# Altium PCB PAM_Interface.PcbDoc
Units mm, origin at the board's own origin, x right, y up, seen from the top; angles counter-clockwise.
Board outline 52 x 25 mm, 2 copper layers (Top Layer, Bottom Layer); 27 components, 21 nets, 111 pads, 26 vias.
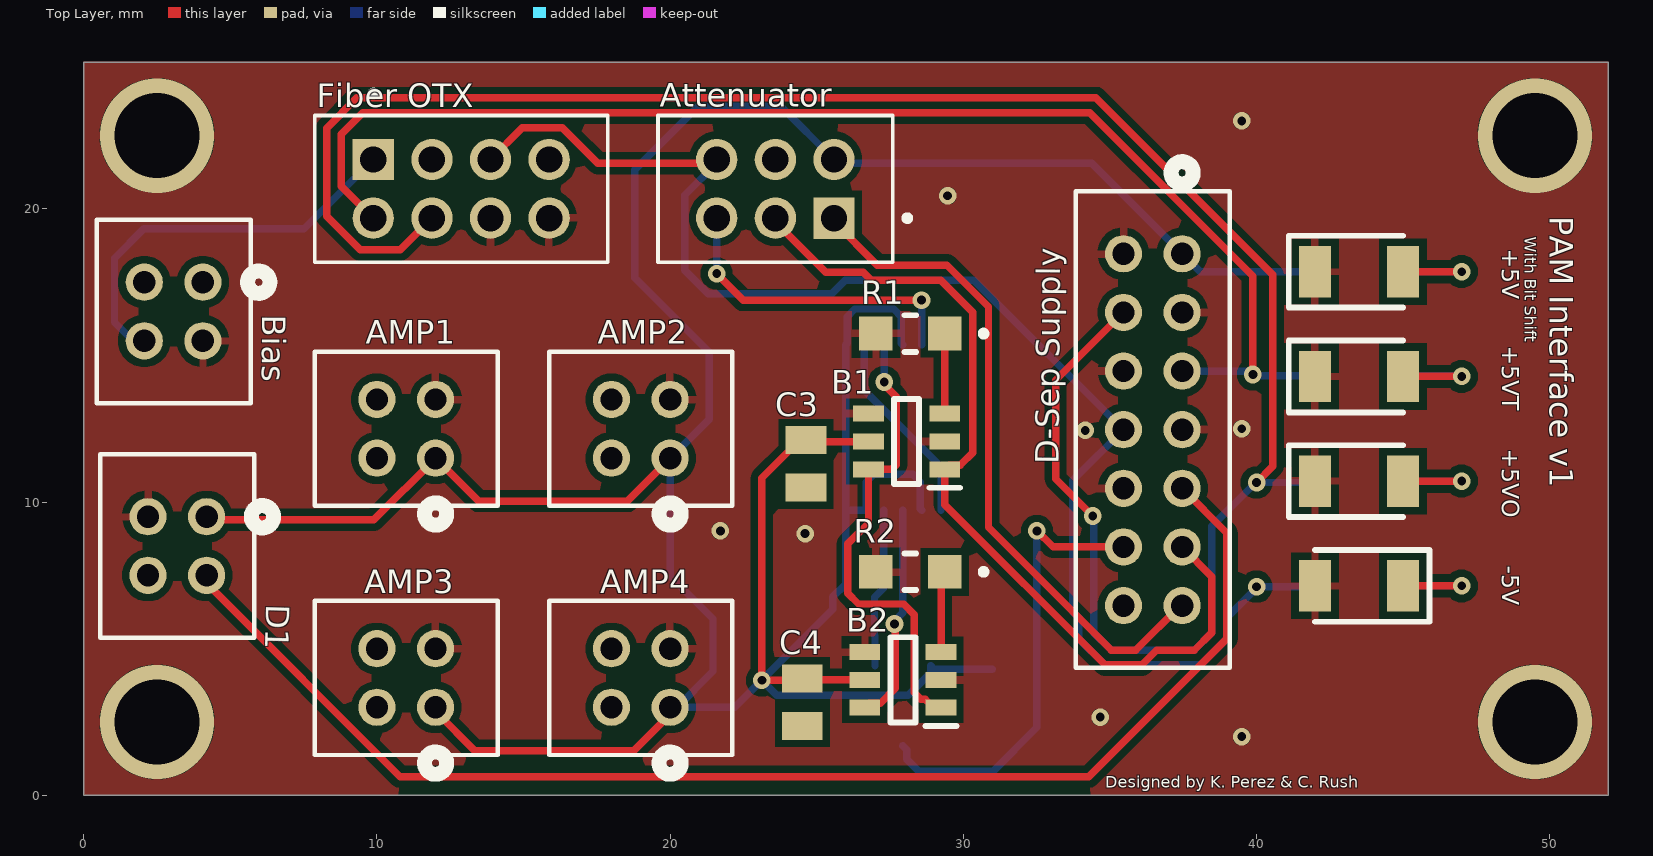
[diagram p0: Top Layer view]
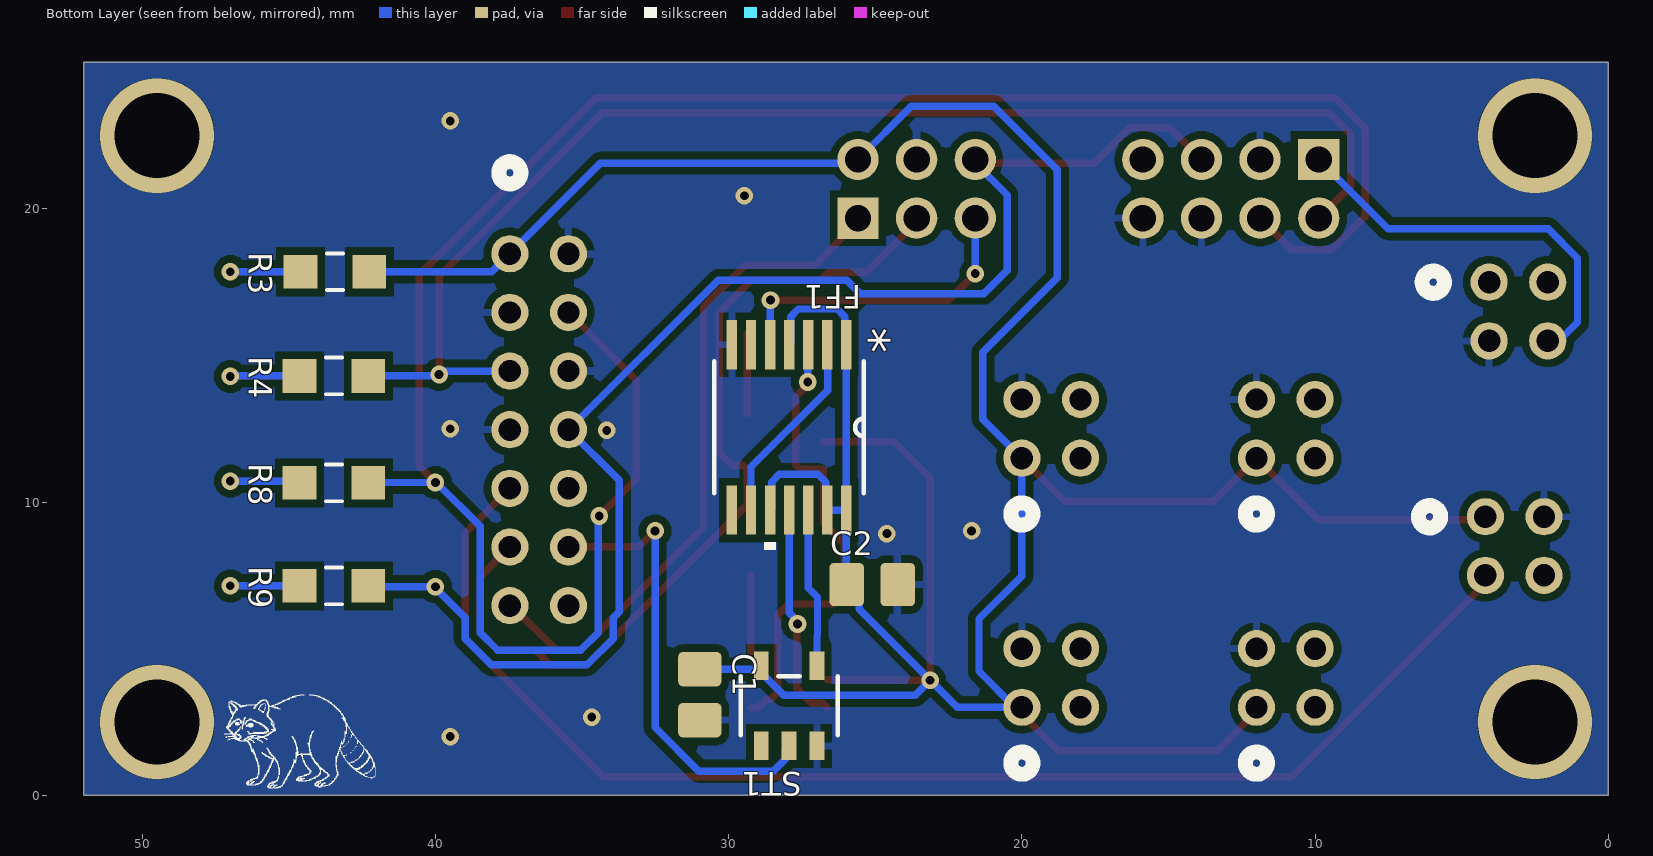
[diagram p1: Bottom Layer view, seen from below]

## Layer stack, top to bottom
Top Solder: solder mask 0.0102, Solder Resist, Dk 3.5
Top Layer: signal copper 0.0356
Dielectric 1: dielectric 0.32, FR-4, Dk 4.8
Bottom Layer: signal copper 0.0356
Bottom Solder: solder mask 0.0102, Solder Resist, Dk 3.5

## Board outline
0,0 0,25 52,25 52,0

## Design rules (kind name [scope] priority, off if disabled: settings)
Clearance [All] p1: gap=0.254 ignorepadtopadclearanceinfootprint=FALSE
ComponentClearance [All] p1: gap=0.1 collisioncheckmode=3 verticalgap=0.254 showdistances=FALSE checkcomponentboundary=TRUE
PolygonConnect [All vs IsPad] p1: connectstyle=Relief reliefconductorwidth=0.254 reliefentries=4 polygonreliefangle="90 Angle" airgapwidth=0.254
RoutingVias [All] p1: holewidth=0.711 width=1.27 viastyle="Through Hole" minholewidth=0.711 minwidth=1.27 maxholewidth=0.711 maxwidth=1.27
SolderMaskExpansion [All] p1: expansion=0.102 istentingtop=FALSE
SupplyNets "Schematic Supply Nets_11" [InNet('CLK1')] p1: voltage=0.000
SupplyNets "Schematic Supply Nets_10" [InNet('CLK2')] p2: voltage=0.000
SupplyNets "Schematic Supply Nets_7" [InNet('DATA_OUT')] p3: voltage=0.000
SupplyNets "Schematic Supply Nets_9" [InNet('DET')] p4: voltage=0.000
SupplyNets "Schematic Supply Nets_8" [InNet('+5VO')] p5: voltage=0.000
SupplyNets "Schematic Supply Nets_6" [InNet('DATA')] p6: voltage=0.000
SupplyNets "Schematic Supply Nets_5" [InNet('+5VT')] p7: voltage=0.000
SupplyNets "Schematic Supply Nets_4" [InNet('CLK')] p8: voltage=0.000
SupplyNets "Schematic Supply Nets_3" [InNet('LOAD')] p9: voltage=0.000
SupplyNets "Schematic Supply Nets_2" [InNet('-5V')] p10: voltage=0.000
SupplyNets "Schematic Supply Nets_1" [InNet('+5V')] p11: voltage=0.000
SupplyNets "Schematic Supply Nets" [InNet('GND')] p12: voltage=0.000
Width [All] p1: maxlimit=0.254 minlimit=0.254 preferedwidth=0.254
29 further rules are at their usual default settings.

## Components (designator, comment, footprint, x,y, rotation, side; value= is the part's Value field where it differs from the comment)
+5V "SML-LX1206GW-TR" LEDC3216X110N 43.5,17.857 r0 top (schematic designator LED1)
+5VO "SML-LX1206GW-TR" LEDC3216X110N 43.5,10.714 r0 top
+5VT "SML-LX1206GW-TR" LEDC3216X110N 43.5,14.286 r0 top
-5V "SML-LX1206GW-TR" LEDC3216X110N 43.5,7.143 r180 top
AMP1 "DF11-4DP-2DSA(24)" CON4_2X2_UF_DF11_HIR 12,11.5 r0 top (schematic designator U4)
AMP2 "DF11-4DP-2DSA(24)" CON4_2X2_UF_DF11_HIR 20,11.5 r0 top (schematic designator U3)
AMP3 "DF11-4DP-2DSA(24)" CON4_2X2_UF_DF11_HIR 12,3 r0 top (schematic designator U2)
AMP4 "DF11-4DP-2DSA(24)" CON4_2X2_UF_DF11_HIR 20,3 r0 top (schematic designator U1)
Attenuator "DF11-6DP-2DSA(24)" HIROSE_DF11-6DP-2DSA(24) 23.59,20.685 r0 top
B1 "LTC6994IS6-1#TRMPBF" SOT95P280X100-6N 28.067,12.065 r180 top
B2 "LTC6994IS6-1#TRMPBF" SOT95P280X100-6N 27.94,3.937 r180 top
Bias "DF11-4DP-2DSA(24)" CON4_2X2_UF_DF11_HIR 4.064,17.5 r90 top
C1 "VJ0805Y104KXQCW1BC" CAPC2012X145N 30.988,3.429 r90 bottom value="0.1 uF"
C2 "VJ0805Y104KXQCW1BC" CAPC2012X145N 25.106,7.186 r180 bottom value="0.1 uF"
C3 "VJ0805Y104KXACW1BC" CAPC2012X70N 24.638,11.303 r90 top
C4 "VJ0805Y104KXACW1BC" CAPC2012X70N 24.511,3.175 r90 top
D1 "DF11-4DP-2DSA(24)" CON4_2X2_UF_DF11_HIR 4.191,9.5 r90 top (schematic designator "Power Detector Module")
"D-Sep Supply" "DF11-14DP-2DSA(24)" CON14_2X7_UF_DF11_HIR 37.465,18.469 r90 top
FF1 "SN74ACT74PWRQ1" PW14 27.94,12.548 r270 bottom (schematic designator "dual Flip Flop 1")
"Fiber OTX" "DF11-8DP-2DSA(24)" HIROSE_DF11-8DP-2DSA(24) 12.875,20.685 r180 top
R1 "ERA-6ARB513V" ERA6AEB101V 28.194,15.748 r180 top
R2 "ERA-6ARB513V" ERA6AEB101V 28.194,7.62 r180 top
R3 "ERA6VEB1000V" RES_ERA6VEB1000V 43.434,17.857 r0 bottom
R4 "ERA6VEB1000V" RES_ERA6VEB1000V 43.467,14.303 r180 bottom
R8 "ERA6VEB1000V" RES_ERA6VEB1000V 43.467,10.656 r0 bottom
R9 "ERA6VEB1000V" RES_ERA6VEB1000V 43.467,7.143 r0 bottom
ST1 "SN74LVC1G17DBVR" DBV5 27.94,3.048 r90 bottom (schematic designator Schmitt-Trigger)

## Footprints (in the part's own frame and the unit in brackets; to place one, negate y for a bottom-side part, rotate by r counter-clockwise, add the part's x,y. Pads: shape width x height; smd on the part's side, far side on the other; paste and mask are expansions set on the pad)
CAPC2012X70N [mm]
  rect 0.96x1.39 smd: 1(-0.81,0) 2(0.81,0)
CAPC2012X145N [mm]
  rrect25% 1.17x1.47 smd paste+0 mask+0.102: 1(-0.87,0) 2(0.87,0)
CON4_2X2_UF_DF11_HIR [mm]
  round 1.27 hole 0.762 paste-2539.97 mask+0.102: 1(0,0) 2(0,2) 3(-2,0) 4(-2,2)
  silkscreen extent -4.13,-2.29 2.13,3.63
CON14_2X7_UF_DF11_HIR [mm]
  round 1.27 hole 0.762 paste-2539.97 mask+0.102: 1(0,0) 2(0,2) 3(-2,0) 4(-2,2) 5(-4,0) 6(-4,2) 7(-6,0) 8(-6,2) 9(-8,0) 10(-8,2) 11(-10,0) 12(-10,2) 13(-12,0) 14(-12,2)
  silkscreen extent -14.13,-1.63 3.14,3.63
DBV5 [mil]
  rect 38.28x20 smd paste+0 mask+0: 1(-53.64,37.4) 2(-53.64,0) 3(-53.64,-37.4) 4(53.64,-37.4) 5(53.64,37.4)
  silkscreen extent -40,-65 40,65, body extent -59,-60 59,60, height 57
ERA6AEB101V [mm]
  rect 1.15x1.15 smd: 1(-1.175,0) 2(1.175,0)
  silkscreen extent -2.6,-0.63 0.2,0.63
HIROSE_DF11-6DP-2DSA(24) [mm]
  rect 1.408x1.408 / inner round 1.408 / far side rect 1.408x1.408 hole 0.9: 1(2,-1)
  round 1.408 hole 0.9: 2(2,1) 3(0,-1) 4(0,1) 5(-2,-1) 6(-2,1)
  silkscreen extent -4,-2.5 4.6,2.5
HIROSE_DF11-8DP-2DSA(24) [mm]
  rect 1.408x1.408 / inner round 1.408 / far side rect 1.408x1.408 hole 0.9: 1(3,-1)
  round 1.408 hole 0.9: 2(3,1) 3(1,-1) 4(1,1) 5(-1,-1) 6(-1,1) 7(-3,-1) 8(-3,1)
  silkscreen extent -5,-3.35 5,2.5
LEDC3216X110N [mm]
  rect 1.1x1.75 smd: 1(-1.5,0) 2(1.5,0)
  silkscreen extent -2.4,-1.22 1.5,1.22
PW14 [mil]
  rect 66x14 smd mask-33: 1(-111,76.77) 2(-111,51.18) 3(-111,25.59) 4(-111,0) 5(-111,-25.59) 6(-111,-51.18) 7(-111,-76.77) 8(111,-76.77) 9(111,-51.18) 10(111,-25.59) 11(111,0) 12(111,25.59) 13(111,51.18) 14(111,76.77)
  silkscreen extent -89,-101 164,101, body extent -130,-101 130,101, height 47
RES_ERA6VEB1000V [mm]
  rect 1.15x1.15 smd: 1(-1.175,0) 2(1.175,0)
  silkscreen extent -0.28,-0.63 0.28,0.63
SOT95P280X100-6N [mm]
  rect 1.05x0.55 smd: 1(-1.3,0.95) 2(-1.3,0) 3(-1.3,-0.95) 4(1.3,-0.95) 5(1.3,0) 6(1.3,0.95)
  silkscreen extent -1.83,-1.45 0.43,1.58

## Part data
+5V +5VO +5VT -5V: "LUMEX - SML-LX1206GW-TR - LED, 2MM X 1.6MM, GREEN, 10MCD, 565NM", Manufacturer_Name=Lumex, Mouser Part Number=696-SML-LX1206GW, Arrow Part Number=SML-LX1206GW-TR, Arrow Price/Stock=https://www.arrow.com/en/products/sml-lx1206gw-tr/lumex?region=nac, Datasheet Link=https://datasheet.datasheetarchive.com/originals/distributors/Datasheets-315/519820.pdf, Geometry.Height=1.1mm, Manufacturer_Part_Number=SML-LX1206GW-TR, Mouser Price/Stock=https://www.mouser.co.uk/ProductDetail/Lumex/SML-LX1206GW-TR?qs=k7wqd3tv8MigBobUZMRxZw%3D%3D
AMP1 AMP2 AMP3 AMP4 Bias D1: library part DF11-4DP-2DSA24, "No Description Available", Manufacturer_Name=Hirose, Copyright="Copyright (C) 2025 Ultra Librarian. All rights reserved.", Manufacturer_Part_Number=DF11-4DP-2DSA(24), RefDes=RefDes, Type=Type
Attenuator: "Connector Header Through Hole 6 position 0.079 (2.00mm)", Package=None, Check_prices=https://www.snapeda.com/parts/DF11-6DP-2DSA(24)/Hirose+Electric+Co+Ltd/view-part/?ref=eda, MF="Hirose Electric Co Ltd", MP=DF11-6DP-2DSA(24), SnapEDA_Link=https://www.snapeda.com/parts/DF11-6DP-2DSA(24)/Hirose+Electric+Co+Ltd/view-part/?ref=snap
B1 B2: "Timer, 2.25 ??5.5 V, 6-pin TSOT-23%0%0", Manufacturer_Name="Analog Devices", Mouser Part Number=584-C6994IS6-1TRMPBF, Datasheet Link=http://cds.linear.com/docs/en/datasheet/699412fb.pdf, Geometry.Height=1mm, Manufacturer_Part_Number=LTC6994IS6-1#TRMPBF, Mouser Price/Stock=https://www.mouser.co.uk/ProductDetail/Analog-Devices/LTC6994IS6-1TRMPBF?qs=hVkxg5c3xu854p16aptbEw%3D%3D
C1 C2 R3 R4 R8 R9: Package=None, Availability=Unavailable, Price=None
  C1 C2: MF="{'manufacturer': u'Vishay Vitramon'}", MP=VJ0805Y104KXQCW1BC
  R3 R4 R8 R9: MP=ERA6VEB1000V
C3 C4: "VISHAY - VJ0805Y104KXACW1BC - CAP, MLCC, X7R, 0.1UF, 50V, 0805", Manufacturer_Name=Vishay, Mouser Part Number=71-VJ0805Y104KXACWBC, Geometry.Height=0.7mm, Manufacturer_Part_Number=VJ0805Y104KXACW1BC, Mouser Price/Stock=https://www.mouser.co.uk/ProductDetail/Vishay-Vitramon/VJ0805Y104KXACW1BC?qs=%252BI21JsQ7UT26DJQ7U%2F1R%2Fw%3D%3D
"D-Sep Supply": library part DF11-14DP-2DSA24, "No Description Available", Manufacturer_Name=Hirose, Copyright="Copyright (C) 2025 Ultra Librarian. All rights reserved.", Manufacturer_Part_Number=DF11-14DP-2DSA(24), RefDes=RefDes, Type=Type
FF1: library part SN74ACT74PWR, "Dual Positive-Edge-Triggered D-Type Flip-Flops With Clear and Preset 14-TSSOP -40 to 125", Manufacturer_Name="Texas Instruments", Copyright="Copyright (C) 2025 Ultra Librarian. All rights reserved.", Datasheet=https://www.ti.com/lit/gpn/sn74act74, Manufacturer_Part_Number=SN74ACT74PWR, RefDes=RefDes, Type=Type
"Fiber OTX": "Connector Header Through Hole 8 position 0.079 (2.00mm)", Package=None, Check_prices=https://www.snapeda.com/parts/DF11-8DP-2DSA(24)/Hirose/view-part/?ref=eda, MF="Hirose Electric", MP=DF11-8DP-2DSA(24), SnapEDA_Link=https://www.snapeda.com/parts/DF11-8DP-2DSA(24)/Hirose/view-part/?ref=snap
R1 R2: "Metal Thin Film Chip Resistor, 0805, 0.125W", Manufacturer_Name=Panasonic, Datasheet Link=https://industrial.panasonic.com/cdbs/www-data/pdf/RDM0000/AOA0000C307.pdf, Geometry.Height=0.6mm, Manufacturer_Part_Number=ERA-6ARB513V
ST1: "Single 1.65-V to 5.5-V buffer with Schmitt-Trigger inputs 5-SOT-23 -40 to 125", Manufacturer_Name="Texas Instruments", Copyright="Copyright (C) 2025 Ultra Librarian. All rights reserved.", Manufacturer_Part_Number=SN74LVC1G17DBVR, RefDes=RefDes, Type=Type

## Via types
v1: diameter 0.6, hole 0.3, Top Layer to Bottom Layer, 22 vias
v2: diameter 3.9, hole 2.9, Top Layer to Bottom Layer, 4 vias

## Nets (pads, with @x,y where several pads share a name; then routed paths per layer and width w, separated by ;. In a path a pad name is that pad's centre, name@x,y a point inside that pad or via, vN(x,y) a via of type N, cw(c..) or ccw(c..) an arc to the next point about the centre after c; other vN are vias at no path point)
+5V: "D-Sep Supply.1" AMP1.1 AMP2.1 AMP3.1 AMP4.1 Attenuator.2 B1.5 B2.5 C1.2 C2.1 C3.2 C4.2 D1.1 FF1.1 FF1.4 FF1.10 FF1.13 FF1.14 R3.1 ST1.5 | length 121.7
  Top Layer w0.254: D1.1@4.191,9.398 9.898,9.398 AMP1.1 13.467,10.033 18.542,10.033 AMP2.1@19.558,11.049 ; AMP3.1@12.065,2.794 13.335,1.524 18.764,1.524 AMP4.1@19.78,2.54 ; B2.5 24.511,3.937 24.495,3.921 v1(23.13,3.921) 23.13,10.82 24.375,12.065 B1.5
  Bottom Layer w0.254: AMP4.1 AMP4.1@20.24,3 ; Attenuator.2@25.59,21.558 34.376,21.558 37.465,18.469 37.467,18.469 38.079,17.857 R3.1 ; Attenuator.2 23.78,23.495 20.955,23.495 18.796,21.336 18.796,17.653 21.336,15.113 21.336,12.827 20.005,11.496 20.005,7.475 21.463,6.017 21.463,4.223 AMP4.1@20.24,3 ; C2.1 25.553,6.764 25.553,6.344 v1(23.13,3.921) ; C2.1@25.99,7.186 FF1.14 ; FF1.4 27.889,15.418 27.889,16.323 27.626,16.586 26.304,16.586 26.041,16.323 26.041,15.418 FF1.1 FF1.14 ; FF1.10 28.539,9.779 28.539,10.684 28.276,10.947 26.954,10.947 26.691,10.684 26.691,9.779 FF1.13 FF1.14 ; C1.2 29.001,4.299 ST1.5 28.89,4.178 28.122,3.41 23.641,3.41 v1(23.13,3.921) ; AMP4.1@20.24,3 22.209,3 v1(23.13,3.921)
+5VO: "D-Sep Supply.4" "Fiber OTX.4" R8.1 | length 75.1
  Top Layer w0.254: 11.875,19.685 10.79,18.6 9.426,18.6 8.282,19.744 8.282,22.757 9.311,23.786 34.522,23.786 40.559,17.749 40.559,11.222 v1(40.005,10.668) ; v1(34.417,9.525) 33.147,10.795 33.147,14.151 35.465,16.469
  Bottom Layer w0.254: v1(34.417,9.525) 34.449,9.493 34.449,5.548 35.044,4.953 37.886,4.953 38.481,5.548 38.481,9.179 39.97,10.668 42.28,10.668 R8.1
+5VT: "D-Sep Supply.5" "Fiber OTX.2" R4.2 | length 45.2
  Top Layer w0.254: 9.875,19.685 8.79,20.77 8.79,22.547 9.521,23.278 34.311,23.278 39.878,17.711 v1(39.878,14.351)
  Bottom Layer w0.254: 37.465,14.469 39.666,14.469 v1@39.784,14.351 ; v1(39.878,14.351) 39.926,14.303 R4.2
-5V: "D-Sep Supply.8" "Fiber OTX.5" Attenuator.6 R9.1 | length 48.8
  Top Layer w0.254: 13.875,21.685 14.96,22.77 16.324,22.77 17.536,21.558 Attenuator.6@21.59,21.558
  Bottom Layer w0.254: Attenuator.6@21.59,21.558 20.505,20.473 20.505,17.914 21.308,17.111 25.514,17.111 25.975,17.572 30.362,17.572 35.465,12.469 33.736,10.74 33.736,6.261 33.941,6.056 33.941,5.338 34.834,4.445 38.096,4.445 38.989,5.338 38.989,6.056 40.005,7.072 v1(40.005,7.112) 41.844,7.112 42.189,7.457 42.189,7.493 R9.1@42.292,7.596
CLK: "D-Sep Supply.11" Attenuator.3 B1.1 | length 30.4
  Top Layer w0.254: Attenuator.3@23.59,19.558 25.304,17.844 26.585,17.844 26.858,17.572 29.234,17.572 30.325,16.481 30.325,11.684 29.904,11.263 29.515,11.263 B1.1 29.367,9.912 34.834,4.445 36.096,4.445 36.604,4.953 37.886,4.953 38.481,5.548 38.481,7.453 37.465,8.469
CLK1: B1.6 B2.1 FF1.3 | length 16.1
  Top Layer w0.254: v1(27.305,14.097) 27.305,14.003 27.711,13.597 27.711,11.264 27.562,11.115 B1.6 26.767,9.279 26.063,8.575 26.063,6.887 26.427,6.523 27.968,6.523 28.334,6.157 28.334,3.504 28.557,3.281 28.696,3.281 28.99,2.987 B2.1
  Bottom Layer w0.254: FF1.3 27.298,15.359 27.298,14.104 v1(27.305,14.097)
CLK2: B2.6 FF1.11 | length 7.5
  Top Layer w0.254: B2.6 26.788,3.135 27.177,3.135 27.686,3.644 27.686,5.809 v1(27.653,5.842)
  Bottom Layer w0.254: v1(27.653,5.842) 27.653,5.936 27.94,6.223 FF1.11
DATA: "D-Sep Supply.12" ST1.2 | length 15.6
  Top Layer w0.254: v1(32.512,9.017) 33.06,8.469 35.465,8.469
  Bottom Layer w0.254: ST1.2 28.067,1.559 28.067,1.23 28.478,0.818 31.021,0.818 32.512,2.31 v1(32.512,9.017)
DATA_OUT: Attenuator.5 FF1.5 | length 10.7
  Top Layer w0.254: v1(21.59,17.792) 22.491,16.891 v1(28.575,16.891)
  Bottom Layer w0.254: v1(21.59,17.792) Attenuator.5@21.59,19.558 ; v1(28.575,16.891) 28.583,16.883 28.583,15.374 FF1.5
DET: "D-Sep Supply.9" D1.3 | length 45.4
  Top Layer w0.254: D1.3@4.191,7.398 4.191,7.231 10.787,0.635 34.286,0.635 38.989,5.338 38.989,8.945 37.465,10.469
GND: "D-Sep Supply.2" "D-Sep Supply.3" "D-Sep Supply.6" "D-Sep Supply.7" "D-Sep Supply.10" "Fiber OTX.3" "Fiber OTX.6" "Fiber OTX.8" +5V.1 +5VO.1 +5VT.1 -5V.2 AMP1.2 AMP2.2 AMP3.2 AMP4.2 Attenuator.4 B1.2 B1.4 B2.2 B2.4 Bias.3 C1.1 C2.2 D1.2 FF1.7 R1.2 R2.2 ST1.3
  other v1: 39.5,2 34.671,2.667 24.605,8.923 21.717,9.017 34.163,12.446 39.5,12.5 29.464,20.447 39.5,23
  other v2: 2.5,2.5 49.5,2.5 2.5,22.5 49.5,22.5
LOAD: "D-Sep Supply.13" Attenuator.1 | length 23
  Top Layer w0.254: Attenuator.1@25.59,19.558 27.068,18.08 29.444,18.08 30.861,16.663 30.861,9.136 35.044,4.953 35.886,4.953 37.402,6.469 37.465,6.469
Net+5VO_2: +5VO.2 R8.2 | length 4.4
  Top Layer w0.254: +5VO.2 v1(47,10.714)
  Bottom Layer w0.254: R8.2 44.7,10.714 v1(47,10.714)
Net+5VT_2: +5VT.2 R4.1 | length 4.4
  Top Layer w0.254: +5VT.2 v1(47,14.286)
  Bottom Layer w0.254: R4.1 v1@47.074,14.303
Net-5V_1: -5V.1 R9.2 | length 4.4
  Top Layer w0.254: -5V.1 v1(47,7.143)
  Bottom Layer w0.254: R9.2 v1@47.022,7.143
NetB1_3: B1.3 R1.1 | length 2.7
  Top Layer w0.254: B1.3 29.369,13.017 R1.1
NetB2_3: B2.3 R2.1 | length 2.6
  Top Layer w0.254: B2.3 29.242,4.889 R2.1@29.242,7.493
NetBias_4: "Fiber OTX.1" Bias.4 | length 13.8
  Bottom Layer w0.254: Bias.4@2.064,15.113 1.048,16.129 1.048,18.32 2.049,19.321 7.511,19.321 9.875,21.685
NetFF1_2: FF1.2 FF1.9 | length 6.7
  Bottom Layer w0.254: FF1.2 26.624,15.351 26.624,13.815 29.24,11.199 FF1.9
NetFF1_12: FF1.12 ST1.4 | length 5.5
  Bottom Layer w0.254: ST1.4 26.99,5.438 26.972,5.456 26.972,6.751 27.29,7.069 FF1.12
NetLED1_2: +5V.2 R3.2 | length 4.4
  Top Layer w0.254: +5V.2 v1(47,17.857)
  Bottom Layer w0.254: R3.2 v1(47,17.857)
pads on no net: "D-Sep Supply.14" "Fiber OTX.7" AMP1.3 AMP1.4 AMP2.3 AMP2.4 AMP3.3 AMP3.4 AMP4.3 AMP4.4 Bias.1 Bias.2 C3.1 C4.1 D1.4 FF1.6 FF1.8 ST1.1

## Polygon pours and split planes (outlines as drawn)
GND on Top Layer "GND_L01_P000" (solid, pour order 0): 0,25.019 52,25.019 52,0 0,0
GND on Bottom Layer "GND_L02_P001" (solid, pour order 1): 0,25.019 52,25.019 52,0 0,0

## Silkscreen, mask and mechanical layers (free items; w line width, h text height)
Top Overlay:
  text "PAM Interface v1" at 50,19.75 h0.8 r270
  text "With Bit Shift" at 49.149,19.055 h0.4 r270
  text "Designed by K. Perez & C. Rush" at 34.847,0.254 h0.4
Bottom Overlay:
  drawing of 78 lines, arcs and shapes, not listed
Board:
  the board outline again, w0.254

## Text inside footprints (layer, text, board x,y; h text height)
FF1: Mechanical 13 "*" at 25.761,15.938 h1.27 r90; Bottom Overlay "*" at 25.761,15.938 h1.27 r90
ST1: Mechanical 13 "*" at 28.306,2.108 h1.27 r270